# EAGLE board HM_Nightfall-mini-2e_v1 (EAGLE 9.6.2)
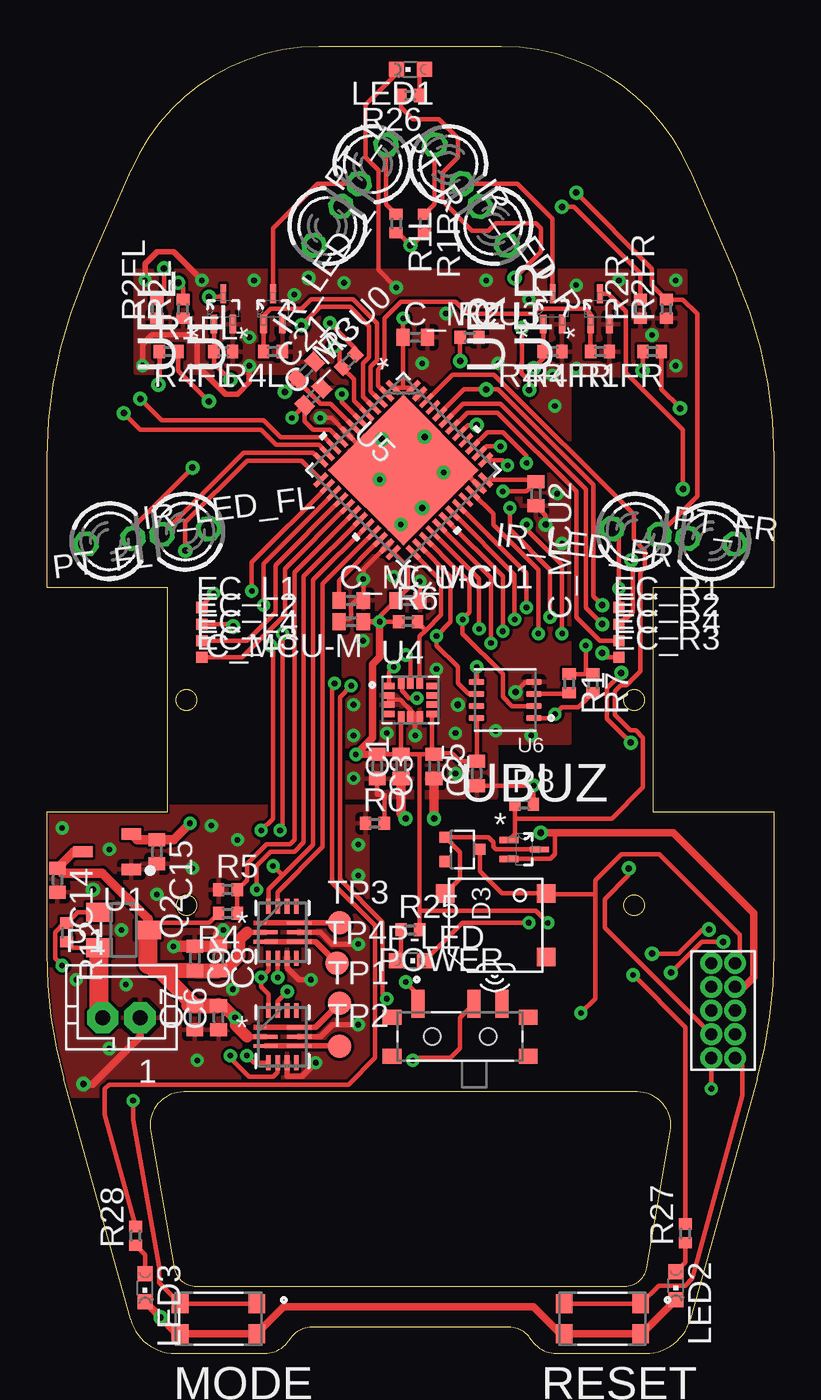
[diagram p0: board, top side]
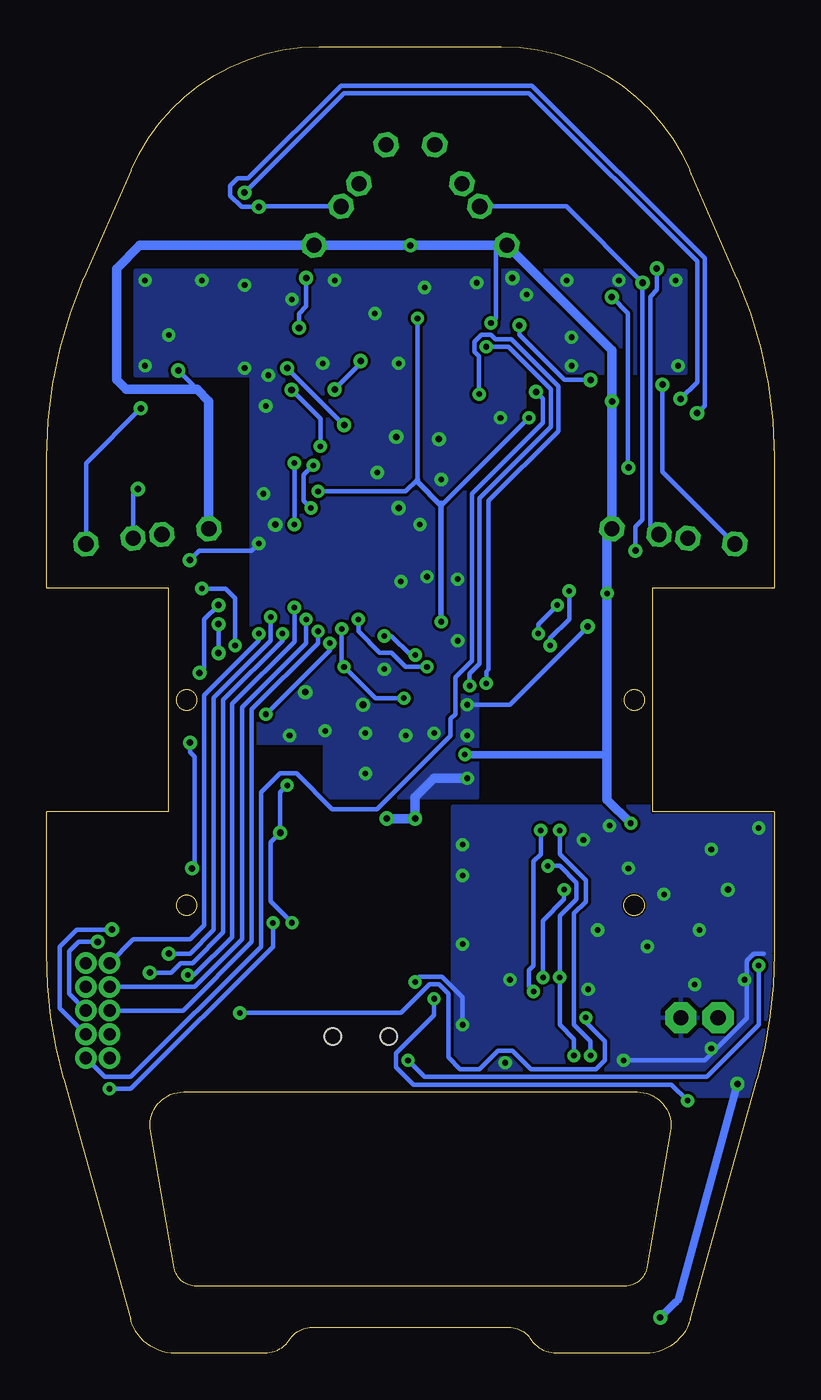
[diagram p1: board, bottom side, seen from below]

Size 39 x 70 mm. Coordinates in mm from the lower left corner, seen from the top.
Outline: 26.02,0.67 25.92,0.81 arc54 24.78,1.4 14.22,1.4 arc54 13.08,0.81 12.98,0.67 arc-54 11.68,0 6.9,0 arc-74 4.49,1.83 0.91,14.72 arc-16 0,21.41 0,29 6.5,29 6.5,41 0,41 0,48 arc-24 1.99,57.58 4.52,63.39 arc-66 14.61,70 24.39,70 arc-66 34.48,63.39 37.01,57.58 arc-24 39,48 39,41 32.5,41 32.5,29 39,29 39,21.41 arc-16 38.09,14.72 34.51,1.83 arc-74 32.1,0 27.32,0 arc-54 26.02,0.67
Outline: 31.66,14 7.34,14 arc100 5.56,11.89 6.83,4.6 arc80 8.01,3.6 30.99,3.6 arc80 32.17,4.6 33.44,11.89 arc100 31.66,14
Outline: circle at 7.5,24 radius 0.55
Outline: circle at 31.5,35 radius 0.55
Outline: circle at 31.5,24 radius 0.55
Outline: circle at 7.5,35 radius 0.55
Copper layers (1*16): Top 0.035mm / dielectric 1.5mm / Bottom 0.035mm
Design rules "default *": minimum track width 6mil, minimum drill 0.2mm, track to track 6mil, track to pad 6mil, pad to pad 6mil, via to via 6mil, smd to smd 6mil, copper to edge 0.1mm, drill to drill 0.15mm, minimum pad ring 10mil, minimum via ring 8mil, stop-mask expansion 4mil, vias tented up to drill 100mil, thermal gap 10mil
Net classes: 1 power: width 0.152 mm; 2 motor: width 0.152 mm

## Footprints (pad centres in the part's own frame; a part is rotated, then mirrored left to right if it is on the bottom)
C0402 = smd 0.7 x 0.9: 1 -0.65,0; 2 0.65,0
SOT323 = smd 0.6 x 0.6: 1 -0.65,-0.925; 2 0.65,-0.925; 3 0,0.925
TP06SQ = smd 0.6 x 0.6: TP 0,0
LED3MM = drill 0.813 octagon: A -1.27,0; K 1.27,0
62201021121 = drill 0.65: 1 -2.54,0.635; 2 -1.27,0.635; 3 0,0.635; 4 1.27,0.635; 5 2.54,0.635; 6 2.54,-0.635; 7 1.27,-0.635; 8 0,-0.635; 9 -1.27,-0.635; 10 -2.54,-0.635
CHIPLED_0603 = smd 0.8 x 0.8: A 0,-0.75; C 0,0.75
SW_TL6330AF200Q = smd 0.9 x 1: 1 -2.05,-0.8; 2 2.05,-0.8; 3 -2.05,0.8; 4 2.05,0.8
JST-PH2 = drill 0.813 pad 1.676 octagon: 1 1,0; 2 -1,0
SW_EG1215AA = smd 0.7 x 1.5: 1 -2.25,1.75; 2 0.75,1.75; 3 2.25,1.75 | smd 1 x 0.8: S1 -3.65,1.05; S2 -3.65,-1.05; S3 3.65,-1.05; S4 3.65,1.05 | hole 0.9: -1.5,0; 1.5,0
SOT23 = smd 1 x 1.4: 1 -0.95,-1.306; 2 0.95,-1.306; 3 0,1.306
R0402 = smd 0.6 x 0.7: 1 -0.5,0; 2 0.5,0
SMT-0540-S-R = smd 1 x 1: + 1.7,-2.7; - 1.7,2.7; M -1.7,-2.7
B1,27 = smd 1.27 x 1.27: TP 0,0
SOT95P280X145-3N = smd 1.05 x 0.6: 1 -1.3,0.95; 2 -1.3,-0.95; 3 1.3,0
QFN-14_MP6551_MNP = smd 0.127 x 0.127: 1 -0.95,0.5 | smd 1.3 x 0.2: 2 -0.9,0; 3 -0.9,-0.5; 8 0.9,-0.5; 9 0.9,0; 10 0.9,0.5 | smd 0.25 x 0.8: 4 -0.75,-1.4; 5 -0.25,-1.4; 6 0.25,-1.4; 7 0.75,-1.4; 11 0.75,1.4; 12 0.25,1.4; 13 -0.25,1.4; 14 -0.75,1.4
PQFN50P250X300X86-14N = smd 0.61 x 0.35: 1 -1.16,0.75; 2 -1.16,0.25; 3 -1.16,-0.25; 4 -1.16,-0.75; 8 1.16,-0.75; 9 1.16,-0.25; 10 1.16,0.25; 11 1.16,0.75 | smd 0.35 x 0.61: 5 -0.5,-0.91; 6 0,-0.91; 7 0.5,-0.91; 12 0.5,0.91; 13 0,0.91; 14 -0.5,0.91
UFQFPN-48_7X7X0P55MM-M = smd 0.908 x 0.255: 1 -3.502,2.75; 2 -3.502,2.25; 3 -3.502,1.75; 4 -3.502,1.25; 5 -3.502,0.75; 6 -3.502,0.25; 7 -3.502,-0.25; 8 -3.502,-0.75; 9 -3.502,-1.25; 10 -3.502,-1.75; 11 -3.502,-2.25; 12 -3.502,-2.75; 25 3.502,-2.75; 26 3.502,-2.25; 27 3.502,-1.75; 28 3.502,-1.25; 29 3.502,-0.75; 30 3.502,-0.25; 31 3.502,0.25; 32 3.502,0.75; 33 3.502,1.25; 34 3.502,1.75; 35 3.502,2.25; 36 3.502,2.75 | smd 0.255 x 0.908: 13 -2.75,-3.502; 14 -2.25,-3.502; 15 -1.75,-3.502; 16 -1.25,-3.502; 17 -0.75,-3.502; 18 -0.25,-3.502; 19 0.25,-3.502; 20 0.75,-3.502; 21 1.25,-3.502; 22 1.75,-3.502; 23 2.25,-3.502; 24 2.75,-3.502; 37 2.75,3.502; 38 2.25,3.502; 39 1.75,3.502; 40 1.25,3.502; 41 0.75,3.502; 42 0.25,3.502; 43 -0.25,3.502; 44 -0.75,3.502; 45 -1.25,3.502; 46 -1.75,3.502; 47 -2.25,3.502; 48 -2.75,3.502 | smd 5.69 x 5.69: 49 0,0
SON65P328X323X55-8N = smd 0.84 x 0.32: 1 -1.545,0.975; 2 -1.545,0.325; 3 -1.545,-0.325; 4 -1.545,-0.975; 5 1.545,-0.975; 6 1.545,-0.325; 7 1.545,0.325; 8 1.545,0.975
SOT50P160X90-3N = smd 1.016 x 0.356: 1 -0.813,0.508; 2 -0.813,-0.508 | smd 1.016 x 0.305: 3 0.813,0

## Placement (x,y rotation side)
C1  0.1u  [C0402]  18.99,31.44 90 top
C2  0.1u  [C0402]  20.77,31.44 270 top
C3  2.2u  [C0402]  17.72,31.44 270 top
C5  0.1u  [C0402]  23.06,31.06 90 top
C6  0.1u  [C0402]  9.21,17.98 90 top
C7  10u  [C0402]  7.94,17.98 90 top
C8  0.1u  [C0402]  9.21,21.16 270 top
C9  10u  [C0402]  7.94,21.16 270 top
C14  1u  [C0402]  0.58,25.35 270 top
C15  2.2u  [C0402]  5.91,26.87 270 top
C21  0.1u  [C0402]  13.91,52.65 45 top
C_MCU0  0.1u  [C0402]  14.29,51.26 45 top
C_MCU1  0.1u  [C0402]  19.37,40.33 0 top
C_MCU2  0.1u  [C0402]  26.23,46.05 270 top
C_MCU3  0.1u  [C0402]  19.75,54.43 0 top
C_MCU-C  2.2u  [C0402]  16.32,40.33 0 top
C_MCU-M  4.7u  [C0402]  16.32,39.19 180 top
D3  BAS16WT1GW  [SOT323]  22.29,27 270 top
EC_L1  PTR1TP06SQ  [TP06SQ]  8.32,39.95 0 top
EC_L2  PTR1TP06SQ  [TP06SQ]  8.32,39.06 0 top
EC_L3  PTR1TP06SQ  [TP06SQ]  8.32,37.29 0 top
EC_L4  PTR1TP06SQ  [TP06SQ]  8.32,38.18 0 top
EC_R1  PTR1TP06SQ  [TP06SQ]  30.68,39.95 0 top
EC_R2  PTR1TP06SQ  [TP06SQ]  30.68,39.06 0 top
EC_R3  PTR1TP06SQ  [TP06SQ]  30.68,37.29 0 top
EC_R4  PTR1TP06SQ  [TP06SQ]  30.68,38.18 0 top
IR_LED_FL  [LED3MM]  3.37,43.51 7 top
IR_LED_FR  [LED3MM]  35.63,43.51 173 top
IR_LED_L  [LED3MM]  17.47,63.7 235 top
IR_LED_R  [LED3MM]  21.53,63.7 305 top
K1  62201021121  [62201021121]  36.26,18.36 270 top
LED1  [CHIPLED_0603]  19.5,68.78 90 top
LED2  [CHIPLED_0603]  33.72,3.63 180 top
LED3  [CHIPLED_0603]  5.28,3.5 180 top
MODE  TL6330AF200Q  [SW_TL6330AF200Q]  9.21,1.85 180 top
P1  [JST-PH2]  4.01,17.98 0 top
P-LED  [CHIPLED_0603]  19.5,21.03 270 top
POWER  EG1215AA  [SW_EG1215AA]  22.17,16.97 0 top
PT_FL  [LED3MM]  7.44,44.02 187 top
PT_FR  [LED3MM]  31.56,44.02 353 top
PT_L  [LED3MM]  15.05,60.4 55 top
PT_R  [LED3MM]  23.95,60.4 125 top
Q2  IRLML6402TRPBF  [SOT23]  4.13,22.68 270 top
R0  0  [R0402]  17.59,28.4 0 top
R1  10k  [R0402]  28.01,35.89 270 top
R1FL  10  [R0402]  6.55,53.67 0 top
R1FR  10  [R0402]  32.45,53.67 180 top
R1L  10  [R0402]  18.74,60.53 270 top
R1R  10  [R0402]  20.26,60.53 270 top
R2  10k  [R0402]  22.68,54.43 0 top
R2FL  1k  [R0402]  5.91,55.96 90 top
R2FR  1k  [R0402]  33.22,55.96 90 top
R2L  1k  [R0402]  7.31,55.96 90 top
R2R  1k  [R0402]  31.82,55.96 90 top
R3  10k  [R0402]  16.2,53.16 45 top
R4  22k  [R0402]  9.72,23.57 180 top
R4FL  10k  [R0402]  9.47,53.67 180 top
R4FR  10k  [R0402]  29.66,53.67 180 top
R4L  10k  [R0402]  12.13,53.67 180 top
R4R  10k  [R0402]  27.12,53.67 180 top
R5  10k  [R0402]  9.72,24.84 0 top
R6  10k  [R0402]  19.37,39.19 0 top
R7  10k  [R0402]  29.28,35.89 270 top
R8  10k  [R0402]  25.6,29.41 0 top
R12  10k  [R0402]  1.09,22.55 270 top
R25  1k  [R0402]  19.5,22.68 0 top
R26  1k  [R0402]  19.5,67.39 180 top
R27  1k  [R0402]  34.23,6.43 90 top
R28  1k  [R0402]  4.77,6.3 90 top
RESET  TL6330AF200Q  [SW_TL6330AF200Q]  29.79,1.85 180 top
SPK1  SMT-0540-S-R  [SMT-0540-S-R]  24.07,22.94 90 top
TP1  TPB1,27  [B1,27]  15.69,18.74 0 top
TP2  TPB1,27  [B1,27]  15.69,16.46 0 top
TP3  TPB1,27  [B1,27]  15.69,23.06 0 top
TP4  TPB1,27  [B1,27]  15.56,20.9 0 top
U1  AP2210N-3.3TRG1  [SOT95P280X145-3N]  3.24,26.87 180 top
U2  MP6551GQB-P  [QFN-14_MP6551_MNP]  12.64,22.55 0 top
U3  MP6551GQB-P  [QFN-14_MP6551_MNP]  12.64,16.97 0 top
U4  ISM330DHCXTR  [PQFN50P250X300X86-14N]  19.5,35 0 top
U5  STM32F413CHU6TRUFQFPN-48_7X7X0P55MM-M  [UFQFPN-48_7X7X0P55MM-M]  19.12,47.32 315 top
U6  CY15B108QI-20LPXC  [SON65P328X323X55-8N]  24.58,35 180 top
UBUZ  2N7002TQ-7-F  [SOT50P160X90-3N]  25.6,27 0 top
UFL  2N7002TQ-7-F  [SOT50P160X90-3N]  9.47,55.96 90 top
UFR  2N7002TQ-7-F  [SOT50P160X90-3N]  29.66,55.96 90 top
UL  2N7002TQ-7-F  [SOT50P160X90-3N]  12.13,55.96 90 top
UR  2N7002TQ-7-F  [SOT50P160X90-3N]  27.12,55.96 90 top

## Library data of the parts
C1-C3 C5-C9 C14 C15 C21 C_MCU0 C_MCU1-C_MCU3 C_MCU-C C_MCU-M = rcl; SPICEPREFIX: C
D3 = BAS16WT1G; AVAILABILITY: In Stock; CHECK_PRICES: https://www.snapeda.com/parts/BAS16WT1G/Onsemi/view-part/?ref=eda; DESCRIPTION: DIODE, SIGNAL, 75V, SC70; Diode Type:Small Signal; Voltage, Vrrm:75V; Time, trr Typ:6ns; Voltage, Vf Max:1.25V; Temperature, Tj Max:150°C; Termination Type:SMD; Operating Temperature Range:-55°C to +150°C; Case Style:SC-70; No. of Pins:3; Voltage, Breakdown Max:75V; MF: ON Semiconductor; MP: BAS16WT1G; PACKAGE: SC-70-3 ON Semiconductor; PRICE: None; SNAPEDA_LINK: https://www.snapeda.com/parts/BAS16WT1G/Onsemi/view-part/?ref=snap
EC_L1-EC_L4 EC_R1-EC_R4 TP1-TP4 = testpad
IR_LED_FL IR_LED_FR IR_LED_L IR_LED_R LED1-LED3 P-LED PT_FL PT_FR PT_L PT_R = led
K1 = pinheader_1m27
MODE RESET = TL6330AF200Q; AVAILABILITY: In Stock; CHECK_PRICES: https://www.snapeda.com/parts/TL6330AF200Q/E-Switch/view-part/?ref=eda; DESCRIPTION: Tactile Switch SPST-NO Top Actuated Surface Mount; MF: E-Switch; MP: TL6330AF200Q; PACKAGE: None; PRICE: None; PURCHASE-URL: https://www.snapeda.com/api/url_track_click_mouser/?unipart_id=2720563&manufacturer=E-Switch&part_name=TL6330AF200Q&search_term=tl6330af200q; SNAPEDA_LINK: https://www.snapeda.com/parts/TL6330AF200Q/E-Switch/view-part/?ref=snap
P1 = jst-ph
POWER = EG1215AA; AVAILABILITY: In Stock; CHECK_PRICES: https://www.snapeda.com/parts/EG1215AA/E-Switch/view-part/?ref=eda; DESCRIPTION: Slide Switch SPDT Surface Mount, Right Angle; MF: E-Switch; MP: EG1215AA; PACKAGE: None; PRICE: None; PURCHASE-URL: https://www.snapeda.com/api/url_track_click_mouser/?unipart_id=3210616&manufacturer=E-Switch&part_name=EG1215AA&search_term=eg1215aa; SNAPEDA_LINK: https://www.snapeda.com/parts/EG1215AA/E-Switch/view-part/?ref=snap
Q2 = IRLML6402; AVAILABILITY: In Stock; CHECK_PRICES: https://www.snapeda.com/parts/IRLML6402/Infineon/view-part/?ref=eda; DESCRIPTION: P-Channel 20 V 3.7A (Ta) 1.3W (Ta) Surface Mount Micro3â„¢ /SOT-23; MF: Infineon Technologies; MP: IRLML6402; PACKAGE: SOT-23-3 ON Semiconductor; PRICE: None; SNAPEDA_LINK: https://www.snapeda.com/parts/IRLML6402/Infineon/view-part/?ref=snap
R0 R1 R1FL R1FR R1L R1R R2 R2FL R2FR R2L R2R R3 R4 R4FL R4FR R4L R4R R5-R8 R12 R25-R28 = rcl; SPICEPREFIX: R
SPK1 = SMT-0540-S-R; DESCRIPTION: Buzzers Transducer, Externally Driven Electromechanical/Magnetic 3V 100mA 4kHz 78dB @ 3V, 10cm Surface Mount Solder Pads; DIGI-KEY_PART_NUMBER: 668-1060-1-ND; MF: PUI; MP: SMT-0540-S-R; PACKAGE: PUI; PURCHASE-URL: https://pricing.snapeda.com/search/part/SMT-0540-S-R/?ref=eda
U1 = AP2210N-3.3TRG1; AVAILABILITY: In Stock; CHECK_PRICES: https://www.snapeda.com/parts/AP2210N-3.3TRG1/Diodes+Inc./view-part/?ref=eda; DESCRIPTION: Voltage Regulators, LDO, 300mA CMOS LDO 3.3V 250mV | Diodes Inc AP2210N-3.3TRG1; MF: Diodes Inc.; MP: AP2210N-3.3TRG1; PACKAGE: SOT-23-3 Diodes Inc.; PRICE: None; PURCHASE-URL: https://www.snapeda.com/api/url_track_click_mouser/?unipart_id=492437&manufacturer=Diodes Inc.&part_name=AP2210N-3.3TRG1&search_term=ldo 3.3v; SNAPEDA_LINK: https://www.snapeda.com/parts/AP2210N-3.3TRG1/Diodes+Inc./view-part/?ref=snap
U2 U3 = MP6551; COPYRIGHT: Copyright (C) 2025 Ultra Librarian. All rights reserved.; MANUFACTURER_PART_NUMBER: MP6551GQB-P; MFR_NAME: Monolithic Power Systems
U4 = ISM330DHCXTR; AVAILABILITY: In Stock; CHECK_PRICES: https://www.snapeda.com/parts/ISM330DHCXTR/STMicroelectronics/view-part/?ref=eda; DESCRIPTION: Accelerometer, Gyroscope, Temperature, 6 Axis Sensor I2C, SPI Output; MF: STMicroelectronics; MP: ISM330DHCXTR; PACKAGE: VFLGA-14 STMicroelectronics; PRICE: None; SNAPEDA_LINK: https://www.snapeda.com/parts/ISM330DHCXTR/STMicroelectronics/view-part/?ref=snap
U5 = STM32F413CHU6TR; COPYRIGHT: Copyright (C) 2026 Ultra Librarian. All rights reserved.; DATASHEET: https://www.st.com/resource/en/datasheet/stm32f413cg.pdf; DESCRIPTION: High-performance access line, Arm Cortex-M4 core with DSP and FPU, 1,5 MByte of Flash memory, 100 MHz CPU, ART Accelerator, DFSDM; MANUFACTURER_NAME: STMicroelectronics; MANUFACTURER_PART_NUMBER: STM32F413CHU6TR
U6 = CY15B108QI-20LPXC; AVAILABILITY: In Stock; CHECK_PRICES: https://www.snapeda.com/parts/CY15B108QI-20LPXC/Infineon/view-part/?ref=eda; DESCRIPTION: FRAM (Ferroelectric RAM) Memory IC 8Mb (1M x 8) SPI 20 MHz 8-GQFN (3.23x3.28); MF: Cypress Semiconductor; MP: CY15B108QI-20LPXC; PACKAGE: UQFN-8 Cypress Semiconductor Corp; PRICE: None; PURCHASE-URL: https://www.snapeda.com/api/url_track_click_mouser/?unipart_id=4328169&manufacturer=Cypress Semiconductor&part_name=CY15B108QI-20LPXC&search_term=None; SNAPEDA_LINK: https://www.snapeda.com/parts/CY15B108QI-20LPXC/Infineon/view-part/?ref=snap
UBUZ UFL UFR UL UR = 2N7002TQ-7-F; AVAILABILITY: In Stock; CHECK_PRICES: https://www.snapeda.com/parts/2N7002TQ-7-F/Diodes+Inc./view-part/?ref=eda; DESCRIPTION: N-Channel 60 V 115mA (Ta) 150mW (Ta) Surface Mount SOT-523; MF: Diodes Inc.; MP: 2N7002TQ-7-F; PACKAGE: SOT-523 Diodes Inc.; PRICE: None; SNAPEDA_LINK: https://www.snapeda.com/parts/2N7002TQ-7-F/Diodes+Inc./view-part/?ref=snap

## Nets
+3V3 [power]: C1.2 C2.1 C3.1 C5.2 C15.1 C_MCU0.1 C_MCU1.1 C_MCU2.1 C_MCU3.1 C_MCU-M.1 EC_L1.TP EC_R1.TP K1.6 PT_FL.A PT_FR.A PT_L.A PT_R.A R1.1 R1FL.2 R1FR.2 R1L.2 R1R.2 R3.2 R6.1 R7.1 R25.2 U1.2 U4.5 U4.8 U5.1 U5.9 U5.24 U5.36 U5.48 U6.8
+5V [power]: C6.2 C7.2 C8.2 C9.2 C14.1 D3.3 K1.1 Q2.3 R4.2 SPK1.+ U1.3 U2.2 U3.2
BOOT0: K1.7 R2.1 U5.44
BUZZER_PWM: R8.1 U5.46 UBUZ.1
EC_L_A: EC_L4.TP U5.16
EC_L_B: EC_L3.TP U5.17
EC_R_A: EC_R4.TP U5.42
EC_R_B: EC_R3.TP U5.43
FAN_PWM: U5.45
FRAM_CS: R7.2 U5.29 U6.1
GND [motor]: C1.1 C2.2 C3.2 C5.1 C21.2 C_MCU0.2 C_MCU1.2 C_MCU2.2 C_MCU3.2 C_MCU-C.2 C_MCU-M.2 EC_L2.TP EC_R2.TP K1.2 LED1.C P-LED.C R0.2 R2.2 R2FL.1 R2FR.1 R2L.1 R2R.1 R4FL.1 R4FR.1 R4L.1 R4R.1 R8.2 U4.2 U4.3 U4.6 U4.7 U5.8 U5.23 U5.35 U5.47 U5.49 U6.4 UBUZ.2 UFL.2 UFR.2 UL.2 UR.2
GND2 [motor]: C6.1 C7.1 C8.1 C9.1 C14.2 C15.2 LED2.C LED3.C MODE.3 MODE.4 P1.1 POWER.1 R0.1 R5.1 RESET.3 RESET.4 U1.1 U2.6 U2.9 U3.6 U3.9
IMU_CS: R6.2 U4.12 U5.25
IR_FL: R4FL.2 U5.4 UFL.1
IR_FR: R4FR.2 U5.2 UFR.1
IR_L: R4L.2 U5.3 UL.1
IR_R: R4R.2 U5.41 UR.1
LED_1: R26.2 U5.38
LED_2: R27.2 U5.32
LED_3: R28.2 U5.6
MOTOR_L_DIR: U3.5 U5.14
MOTOR_L_OUT1 [motor]: TP1.TP U3.1 U3.10
MOTOR_L_OUT2 [motor]: TP2.TP U3.3 U3.8
MOTOR_L_PWM: U3.13 U5.15
MOTOR_R_DIR: U2.5 U5.19
MOTOR_R_OUT1 [motor]: TP3.TP U2.1 U2.10
MOTOR_R_OUT2 [motor]: TP4.TP U2.3 U2.8
MOTOR_R_PWM: U2.13 U5.21
MOTOR_STBY: U2.4 U2.14 U3.4 U3.14 U5.20
N$2: IR_LED_FL.K UFL.3
N$4: R1.2 U6.3
N$5: C_MCU-C.1 U5.22
N$7: P1.2 Q2.2 R12.2
N$8: IR_LED_FL.A R1FL.1
N$10: IR_LED_L.K UL.3
N$11: POWER.2 Q2.1 R12.1
N$16: IR_LED_L.A R1L.1
N$18: IR_LED_FR.K UFR.3
N$21: P-LED.A R25.1
N$23: D3.1 SPK1.- UBUZ.3
N$27: LED1.A R26.1
N$28: IR_LED_FR.A R1FR.1
N$29: IR_LED_R.K UR.3
N$30: IR_LED_R.A R1R.1
N$36: LED2.A R27.1
N$41: LED3.A R28.1
NRST: C21.1 K1.5 RESET.1 RESET.2 U5.7
PUSH_IN_1: MODE.1 MODE.2 R3.1 U5.5
SENSOR_FL: PT_FL.K R2FL.2 U5.12
SENSOR_FR: PT_FR.K R2FR.2 U5.10
SENSOR_L: PT_L.K R2L.2 U5.13
SENSOR_R: PT_R.K R2R.2 U5.11
SPI2_MISO: U4.1 U5.27 U6.2
SPI2_MOSI: U4.14 U5.28 U6.5
SPI2_SCK: U4.13 U5.26 U6.6
SWCLK: K1.4 U5.37
SWDIO: K1.3 U5.34
SWO: K1.10 U5.39
USART1_RX: K1.9 U5.31
USART1_TX: K1.8 U5.30
VOL_CHECK: R4.1 R5.2 U5.18

## Tracks (layer width: path | path; a pad name or v marks a point on that pad's centre or on a via)
+3V3  (via drill 0.3, 0.35)
  Top 0.254: 13.87,50.8 C_MCU0.1 | U5.1 19.12,51.74 | 19.12,51.74 19.1,51.76 C_MCU3.1 19.1,55.43 v19.12,55.45 | U5.36 26.14,46.79 C_MCU2.1 25.71,46.18 v24.45,46.18 | C_MCU0.1 v13.15,50.11 | v13.15,50.11 | 17.47,39.19 17.58,39.19 C_MCU1.1 19.37,40.98 19.37,42.11 U5.24 | U6.8 23.06,34 C5.2 22.15,31.71 21.71,32.15 20.71,32.15 | U4.8 20.66,32.2 20.71,32.15 | 20.71,32.15 C2.1 20.01,32.09 | U4.5 19,32.21 | 19,32.21 19,32.1 C1.2 C3.1 | 20.01,32.09 19.11,32.09 19,32.21 | R6.1 v17.85,39.19 | EC_L1.TP 8.32,40.08 v8.96,40.72 | EC_R1.TP v30.68,40.97 30.68,43.8 PT_FR.A | R1.1 28.9,36.39 | R7.1 28.9,36.39 | 28.9,36.39 v28.9,37.92 | R25.2 20,23.7 | 20,23.7 20,32.09 20.01,32.09 | K1.6 v35.63,14.17 | v26.87,23.06 26.23,23.7 20,23.7 | U5.9 15.19,49.48 14.29,49.48 13.83,49.94 C_MCU0.1 | R3.2 16.55,53.82 v15.18,55.19 | R1R.2 19.59,59.36 v19.5,59.36 18.83,60.03 R1L.2 | R1FR.2 31.95,52.66 v31.95,52.65 | R1FL.2 7.05,52.65 v8.7,51 | 19.12,51.74 U5.48
  Top 0.305: C_MCU-M.1 17.47,39.19 v17.85,39.19
  Top 0.406: C3.1 16.59,32.09 | 16.59,32.09 v16.58,32.08 | 16.59,32.09 17.47,32.97 17.47,36.91 17.85,37.29 v17.85,39.19
  Top 0.508: U1.2 4.84,27.52 C15.1 6.81,27.52 v7.69,28.4
  Bottom 0.254: v13.15,50.11 17.85,45.41 | v19.12,55.45 19.12,46.81 19.75,46.18 v24.45,46.18 | v28.9,37.92 28.9,40.46 29.41,40.97 v30.68,40.97 | v35.63,14.17 34.48,14.17 26.87,21.79 v26.87,23.06 | v15.18,55.19 14.93,55.45 14.93,59.36 | v31.95,52.65 30.3,51.01 30.3,51
  Bottom 0.305: v17.85,39.19 17.85,45.41 | 17.85,45.54 17.85,45.41 | 17.85,45.41 19.12,46.68 19.12,46.81
  Bottom 0.406: v16.58,32.08 8.96,32.08
  Bottom 0.508: v7.69,28.4 8.96,29.67 8.96,32.08 v8.96,40.72 8.96,43.91 PT_FL.A v8.7,51 8.7,53.73 PT_L.A 14.93,59.36 v19.5,59.36 PT_R.A 34,59.36 35.25,58.11 35.25,52.15 34.74,51.64 30.93,51.64 30.3,51.01 | 30.3,51 PT_FR.A
+5V  (via drill 0.3)
  Top 0.254: Q2.3 5.82,23.06 8.71,23.06 R4.2 | v28.64,18.24 29.41,19 29.41,24.59 | K1.1 37.15,21.16 37.15,22.43 32.84,26.75 30.8,26.75 29.41,25.35 29.41,24.59 | 29.41,24.59 26.82,24.59 SPK1.+ 24.4,24.64 23.22,25.82 D3.3
  Top 0.305: U2.2 10.74,22.55 | U3.2 10.74,16.97
  Top 0.508: U1.3 1.45,26.87 C14.1 0.85,25.73 2.99,25.73 5.44,23.28 Q2.3
  Top 0.61: 10.74,22.55 10.36,22.17 10.36,21.28 9.58,20.51 C8.2 | C6.2 9.45,18.63 v10.1,17.98 10.1,17.89 10.12,17.87 10.12,17.58 10.74,16.97
  Top 0.813: C8.2 C9.2 6.07,20.51 | 7.64,18.63 C7.2 | C7.2 C6.2 | 5.44,20.83 5.76,20.51 6.07,20.51 | C7.2 6.07,20.51
  Top 1.016: 5.44,20.83 Q2.3
  Bottom 0.254: v28.64,18.24 20.01,18.24 18.48,19.76 17.98,19.76 17.47,19.25 17.47,15.85 16.83,15.21 15.79,15.21 14.8,16.2 14.04,16.2 13.05,15.21 9.57,15.21 9.09,15.7 9.09,16.71 10.1,17.73 v10.1,17.98
BOOT0  (via drill 0.35)
  Top 0.254: v29.79,40.08 29.3,40.56 29.3,46.53 24.2,51.64 v23.56,51.64 22.38,51.64 U5.44 | v30.8,36.46 30.8,36.4 30.04,35.64 30.04,33.98 v31.31,32.71 | v31.21,25.98 31.18,25.96 31.18,25.6 29.91,24.33 29.91,22.81 K1.7 | v22.17,53.16 R2.1
  Bottom 0.254: v29.79,40.08 30.55,39.32 30.55,36.71 v30.8,36.46 | v31.31,32.71 31.31,32.21 31.06,31.95 31.06,26.13 v31.21,25.98 | v23.56,51.64 22.17,53.03 v22.17,53.16
BUZZER_PWM
  Top 0.254: R8.1 25.1,28.65 | 25.1,28.65 25.1,27.82 UBUZ.1 | U5.46 21.75,52.42 23.99,52.42 31.47,44.94 31.47,43.6 32.07,43 32.07,42.11 31.82,41.86 31.82,36.54 31.07,35.8 30.78,35.8 30.45,35.47 30.45,34.21 31.29,33.37 31.58,33.37 31.97,32.99 31.97,30.32 30.3,28.65 25.1,28.65
EC_L_A
  Top 0.254: U5.16 12.26,42.23 12.26,39.7 10.74,38.18 EC_L4.TP
EC_L_B
  Top 0.254: U5.17 12.77,42.03 12.77,39.57 10.48,37.29 EC_L3.TP
EC_R_A
  Top 0.254: U5.42 22.55,50.39 24.18,50.39 28.39,46.18 28.39,39.45 29.66,38.18 EC_R4.TP
EC_R_B  (via drill 0.35)
  Top 0.254: U5.43 22.32,50.88 24.33,50.88 28.9,46.3 28.9,39.95 v29.79,39.06 | v29.79,37.52 30.02,37.29 EC_R3.TP
  Bottom 0.254: v29.79,39.06 v29.79,37.52
FRAM_CS  (via drill 0.3)
  Top 0.254: U6.1 27.03,34.03 v27.25,34.24 27.63,34.62 28.51,34.62 R7.2 | 23.82,41.56 v23.82,38.05 | U5.29 23.82,41.56 | 23.82,41.56
  Bottom 0.254: v27.25,34.24 23.82,37.67 v23.82,38.05
GND  (via drill 0.3, 0.35)
  Top 0.254: U4.2 18.34,35 | 18.34,35 U4.3 | U4.6 19.75,34.09 | U4.7 19.75,34.09 | 18.34,35 18.96,35 19.29,34.67 19.75,34.21 19.75,34.09 | 19.75,34.09 v19.75,33.1 | C_MCU1.2 20.02,41.34 v20.01,41.35 | C_MCU-M.2 15.8,39.32 16.2,39.32 16.32,39.45 16.32,40.08 16.58,40.33 C_MCU-C.2 v16.98,41.48 16.98,41.99 U5.23 | C_MCU2.2 26.74,44.89 v26.74,44.4 | P-LED.C 22.28,23.06 v25.85,23.06 | UBUZ.2 26.99,26.49 27.25,26.75 27.25,27.89 | v17.85,46.81 17.85,47.53 U5.8 15.26,50.11 v14.67,50.11 | R8.2 v26.1,30.42 | v26.1,30.42 v26.1,30.43 | U6.4 25.68,35.98 v25.13,35.42 | LED1.C 18.75,68.54 17.09,66.88 17.09,64.08 17.79,63.38 17.79,58.05 v18.74,57.1 | U5.35 22.43,47.19 v21.28,47.19 | v10,38.94 9.87,39.06 EC_L2.TP | EC_R2.TP 30.99,39.37 31.09,39.37 31.41,39.7 31.41,42.41 v31.33,42.49 | C3.2 17.72,29.92 18.1,29.92 18.1,28.4 R0.2 | C5.1 26.09,30.41 v26.1,30.42
  Top 0.305: v10.86,52.91 10.86,52.02 10.23,51.38 9.59,51.38 8.07,52.91 8.07,54.18 7.69,54.56 5.66,54.56 5.15,54.05 v5.15,52.91 | v5.28,57.48 5.28,58.37 5.91,59 6.8,59 v8.32,57.48
  Top 0.406: K1.2 37.41,19.63 37.91,20.14 37.91,23.57 33.6,27.89 27.25,27.89 v26.48,27.89
  Top 0.508: C2.2 v20.77,28.65 | v19.25,28.65 18.99,28.9 C1.1
  Bottom 0.254: v25.85,23.06 26.99,24.21 26.99,27.38 v26.48,27.89 26.48,30.05 v26.1,30.43 | v16.45,34.75 14.17,34.75 10,38.91 v10,38.94 | v31.33,42.49 30.83,43 28.01,43 v27.63,43.38
  Bottom 0.508: v20.77,28.65 v19.25,28.65 19.25,29.79 18.23,30.81 v16.45,30.81
  other vias: 18.99,44.4 10.86,54.43 13.28,56.72 15.94,57.35 21.41,55.7 20.14,53.03 23.56,57.48 25.85,56.46 24.2,53.03 27.12,52.4 27.25,50.75 28.39,52.78 27.37,46.05 33.72,52.91 32.45,54.56 30.68,57.48 28.39,57.23 33.72,57.48 11.12,57.48 24.07,33.35 21.91,31.06 18.23,33.22 16.45,33.1 18.61,41.6 16.96,38.18 20.9,36.65 21.91,33.22 14.04,57.61 17.98,48.97 20.26,49.1 20.14,45.29 22.04,34.75 25.98,33.1
  pour Top: 4.77,52.53 13.4,52.53 13.4,46.05 15.94,43.51 15.94,29.79 24.07,29.79 24.07,32.71 28.01,32.71 28.01,52.4 34.23,52.4 34.23,57.99 4.77,57.99
  pour Bottom: 4.77,57.99 34.23,57.99 34.23,52.4 28.01,52.4 28.01,32.71 24.07,32.71 24.07,29.79 15.94,29.79 15.94,43.51 13.4,46.05 13.4,52.53 4.77,52.53
GND2  (via drill 0.3, 0.35)
  Top 0.254: POWER.1 19.92,19.22 v19.25,19.89
  Top 0.305: v16.71,21.92 15.31,21.92 14.67,22.55 U2.9 | U3.9 14.69,16.97 15.32,17.6 v16.71,17.6 | U3.6 12.89,14.84 12.9,14.83 13.68,14.83 v14.42,15.57 | U2.6 12.89,20.65 13.53,20.01 v14.17,20.01
  Top 0.406: LED2.C 31.9,1.05 RESET.3 RESET.4 27.54,1.05 26.1,2.49 12.7,2.49 MODE.3 MODE.4 6.98,1.05 v6.11,1.92 LED3.C | v1.97,14.43 2.48,14.43 5.01,16.95 P1.1
  Top 0.61: v6.8,21.79 6.81,21.81 C9.1 C8.1 9.21,22.43 v9.47,22.68
  Bottom 0.254: v19.25,19.89 19.25,19.95 19.03,20.17 17.81,20.17 16.71,19.07 v16.71,17.6 | 0.57,21.41 1.09,21.41 1.46,21.04 1.46,17.94 3.71,15.7 v8.07,15.7
  Bottom 0.406: v6.11,1.92 LED3.C | LED3.C 5.15,2.88 v1.97,14.43 | LED3.C
  other vias: 0.83,28.14 3.37,27 8.83,28.27 7.82,25.98 5.91,24.59 4.01,22.68 4.26,19.76 1.59,20.01 3.37,16.33 9.97,19.51 10.23,27.51 16.71,25.6 16.71,27.25 2.48,24.84
  pour Top: -0.18,29.29 17.21,29.29 17.21,13.79 0.58,13.79 -0.18,14.55
  pour Bottom: -0.18,29.29 17.21,29.29 17.21,13.79 0.58,13.79 -0.18,14.55
IMU_CS
  Top 0.254: U4.12 20,38.42 20.33,38.75 | 21.15,41.4 21.15,39.57 20.33,38.75 | R6.2 20.32,38.75 20.33,38.75 | U5.25 21.15,41.4 | 21.15,41.4
IR_FL  (via drill 0.35)
  Top 0.254: UFL.1 R4FL.2 8.97,53.03 v9.85,52.15 | U5.4 16.96,51.25 16.96,53.03 17.29,53.36 17.29,55.03 16.26,56.06 14.65,56.06 v13.66,55.07
  Bottom 0.254: v13.66,55.07 13.66,54.56 11.24,52.15 v9.85,52.15
IR_FR
  Top 0.254: U5.2 17.77,51.85 17.77,52.7 18.1,53.03 18.1,55.45 18.99,56.34 21.91,56.34 22.55,55.7 26.1,55.7 26.16,55.75 26.16,55.77 26.34,55.96 28.9,55.96 29.15,55.7 UFR.1 R4FR.2
IR_L
  Top 0.254: R4L.2 UL.1 11.63,55.57 12.01,55.96 13.66,55.96 14.17,56.46 16.43,56.46 17.7,55.19 17.7,53.2 17.37,52.87 17.37,51.55 U5.3
IR_R  (via drill 0.35)
  Top 0.152: R4R.2
  Top 0.254: U5.41 22.59,49.73 v23.06,49.73 | v26.1,52.78 26.62,53.3 R4R.2 UR.1
  Bottom 0.254: v23.06,49.73 v26.1,52.78
LED_1  (via drill 0.3, 0.35)
  Top 0.254: U5.38 23.57,48.59 v24.33,48.59 | v25.87,51.62 25.87,52.08 25.45,52.51 25.45,53.05 25.47,53.08 v25.47,54.94 | R26.2 19,66.74 19.63,66.12 21.02,66.12 22.04,65.1 22.04,64.08 21.21,63.25 21.21,61.74 22.8,60.15 23.69,60.15 24.07,60.53 26.23,60.53 26.48,60.27 26.48,59 v25.09,57.61
  Bottom 0.254: v24.33,48.59 24.33,50.07 v25.87,51.62 | v25.47,54.94 25.47,55.7 25.09,56.08 v25.09,57.61
LED_2  (via drill 0.3)
  Top 0.254: U5.32 25.72,41.78 v25.72,39.95 | v31.44,20.27 34.23,17.47 R27.2
  Bottom 0.254: v25.72,39.95 25.72,38.12 29.05,34.79 29.05,22.3 31.08,20.27 v31.44,20.27
LED_3  (via drill 0.3)
  Top 0.254: R28.2 3.12,12.78 3.12,14.17 3.35,14.4 16.17,14.4 17.59,15.82 17.59,22.94 15.31,25.22 15.31,35.76 v15.43,35.89 | U5.6 15.82,50.98 v15.82,51.38
  Bottom 0.254: v15.43,35.89 15.43,36.53 15.31,36.65 15.31,45.67 11.57,49.4 11.57,51.82 14.08,54.33 14.95,54.33 15.17,54.56 15.7,54.56 16.07,54.19 16.07,53.66 15.82,53.41 v15.82,51.38
MOTOR_L_DIR  (via drill 0.3)
  Top 0.254: U3.5 12.39,15.07 12.13,14.81 10.86,14.81 9.85,15.82 v9.85,15.95 | U5.14 10.99,42.37 v10.99,40.84 | v12.01,37.92 12.13,37.79 12.13,28.65 v11.5,28.02
  Bottom 0.254: v10.99,40.84 10.99,39.32 12.01,38.3 v12.01,37.92 | v11.5,28.02 11.5,26.75 10.1,25.35 10.1,24.21 10.74,23.57 10.74,17.6 9.85,16.71 v9.85,15.95
MOTOR_L_OUT1
  Top 0.305: U3.1 U3.10 14.41,17.47 TP1.TP
MOTOR_L_OUT2
  Top 0.305: U3.3 U3.8 TP2.TP
MOTOR_L_PWM  (via drill 0.3)
  Top 0.254: U3.13 12.39,18.88 v12.9,19.38 | U5.15 11.63,42.3 v11.63,40.08 | v12.64,38.55 12.64,28.14 v12.52,28.02
  Bottom 0.254: v11.63,40.08 12.64,39.06 v12.64,38.55 | v12.52,28.02 12.52,26.75 12.9,26.36 12.9,20.78 13.15,20.52 13.15,19.63 v12.9,19.38
MOTOR_R_DIR  (via drill 0.3)
  Top 0.254: U2.5 v12.39,20.14 | U5.19 13.79,41.63 13.79,27.38 13.28,26.87 12,26.87 11.5,26.37 11.26,26.12 v11.26,24.84
  Bottom 0.254: v11.26,24.84 11.26,24.32 12.39,23.19 v12.39,20.14
MOTOR_R_OUT1
  Top 0.305: U2.1 U2.10 TP3.TP
MOTOR_R_OUT2
  Top 0.305: TP4.TP 14.41,22.05 U2.8 U2.3
MOTOR_R_PWM
  Top 0.254: U5.21 14.8,41.23 14.8,27.13 12.39,24.71 U2.13
MOTOR_STBY  (via drill 0.3)
  Top 0.254: U2.4 11.89,20.53 v11.5,20.14 11.5,19.63 11.89,19.24 U3.14 | U3.4 11.12,15.57 v10.74,15.95 | U5.20 14.29,41.43 14.29,27.25 12.64,25.6 | U2.14 11.89,24.85 12.64,25.6 | 12.64,25.6 v12.13,26.11
  Bottom 0.254: v12.13,26.11 11.5,26.11 10.61,25.22 10.61,24.33 11.5,23.44 v11.5,20.14 11.5,17.6 10.74,16.84 v10.74,15.95
N$2  (via drill 0.35)
  Top 0.254: UFL.3 9.29,56.59 v8.71,56.59 | IR_LED_FL.K 4.63,44.26 v7.82,47.45
  Bottom 0.254: v8.71,56.59 7.84,55.73 7.84,47.47 v7.82,47.45
N$4
  Top 0.254: U6.3 27.95,35.33 R1.2
N$5
  Top 0.254: U5.22 15.68,41.4 C_MCU-C.1
N$7
  Top 0.254: R12.2 1.41,21.73 Q2.2
  Top 1.016: P1.2 2.83,18.16 Q2.2
N$8  (via drill 0.35)
  Top 0.254: R1FL.1 6.05,51.95 v5.99,51.89
  Bottom 0.254: v5.99,51.89 5.99,47.23 IR_LED_FL.A
N$10
  Top 0.254: IR_LED_L.K 14.52,62.66 12.13,60.27 UL.3
N$11  (via drill 0.3)
  Top 0.254: Q2.1 1.66,23.63 R12.1 0.95,23.05 0.45,22.55 0.45,21.16 v0.83,20.78 | POWER.2 22.17,17.97 22.17,16.33 21.66,15.82 19.75,15.82 v19.63,15.7
  Bottom 0.254: v0.83,20.78 0.83,17.6 3.62,14.81 18.74,14.81 v19.63,15.7
N$16
  Top 0.254: R1L.1 18.2,61.57 IR_LED_L.A
N$18  (via drill 0.35)
  Top 0.254: UFR.3 30.12,56.77 31.06,55.83 31.06,53.42 31.06,53.41 31.06,52.53 34.11,49.48 v34.11,46.3
  Bottom 0.254: IR_LED_FR.K 34.37,46.04 v34.11,46.3
N$21
  Top 0.254: P-LED.A 18.75,21.3 19,21.55 R25.1
N$23
  Top 0.254: SPK1.- 22.17,25.43 22.17,26.85 D3.1 23.68,27.65 23.95,27.38 23.95,27.13 24.07,27 UBUZ.3
N$27
  Top 0.254: R26.1 20,68.53 LED1.A
N$28  (via drill 0.35)
  Top 0.254: R1FR.1 32.96,53.66 32.96,51.64 33.95,50.64 v33.95,50.62
  Bottom 0.254: v33.95,50.62 36.89,47.69 IR_LED_FR.A
N$29
  Top 0.254: UR.3 27.12,60.78 25.24,62.66 IR_LED_R.K
N$30
  Top 0.254: R1R.1 20.8,61.57 IR_LED_R.A
N$36
  Top 0.254: LED2.A 34.23,4.89 R27.1
N$41
  Top 0.254: LED3.A 5.28,5.29 R28.1
NRST  (via drill 0.35)
  Top 0.254: K1.5 37.28,15.44 37.28,13.79 34.61,4.01 34.23,3.63 32.81,3.63 RESET.1 RESET.2 | v12.77,51.51 C21.1 13.45,52.1 14.68,50.87 14.94,50.87 15.21,50.87 U5.7 | v12.77,51.51
  Bottom 0.254: v12.77,51.51 12.39,51.13 12.39,49.86 16.2,46.05 16.2,37.1 17.09,36.21 17.09,34.24 17.34,33.98 17.34,33.1 21.28,29.16 23.69,29.16 25.6,31.06 26.48,31.06 27.5,30.05 27.5,21.79 34.49,14.81 35.88,14.81 K1.5
PUSH_IN_1  (via drill 0.3)
  Top 0.254: MODE.1 MODE.2 6.04,3.78 6.04,4.65 4.64,12.52 v4.64,13.54 | v18.23,19 18,19.23 18,23.1 15.71,25.39 15.71,35.15 v16.32,35.76 | v15.44,53.92 15.69,53.67 15.69,52.96 R3.1 16.48,52.17 16.48,51.02 U5.5
  Bottom 0.254: v4.64,13.54 5.51,14.4 19.35,14.4 20.26,15.32 20.26,16.08 18.23,18.11 v18.23,19 | v15.44,53.92 14.25,53.92 11.98,51.65 11.98,49.63 15.79,45.82 15.79,36.93 16.32,36.4 v16.32,35.76
SENSOR_FL  (via drill 0.35)
  Top 0.254: U5.12 14.29,48.26 10.57,48.26 PT_FL.K | R2FL.2 6.29,56.84 v6.29,58.11
  Bottom 0.254: v6.29,58.11 6.29,56.97 6.65,56.62 6.65,44.34 PT_FL.K
SENSOR_FR  (via drill 0.35)
  Top 0.254: U5.10 14.89,49.07 12.54,49.07 11.63,49.99 6.16,49.99 v5.02,51.13 | PT_FR.K 34.87,45.9 34.87,55.7 34.11,56.46 R2FR.2 32.45,57.22 32.45,58.11 v28.39,62.18
  Bottom 0.254: v28.39,62.18 23.06,67.51 13.15,67.51 4.13,58.5 4.13,52.02 v5.02,51.13
SENSOR_L  (via drill 0.35)
  Top 0.254: U5.13 13.66,47.83 10.74,47.83 7.44,44.53 v7.44,43 | v7.05,57.35 7.31,57.1 R2L.2
  Bottom 0.254: PT_L.K 11.14,61.44 v7.05,57.35 7.05,44.65 7.44,44.27 v7.44,43
SENSOR_R  (via drill 0.35)
  Top 0.254: U5.11 14.59,48.67 12.31,48.67 11.5,49.48 5.02,49.48 v4.13,50.37 | v27.63,61.42 28.26,61.42 31.82,57.86 R2R.2
  Bottom 0.254: PT_R.K 27.6,61.44 v27.63,61.42 28.56,61.42 29.15,62.01 29.15,62.56 28.77,62.94 28.2,62.94 23.22,67.92 12.98,67.92 3.73,58.66 3.73,50.77 v4.13,50.37
SPI2_MISO  (via drill 0.3)
  Top 0.254: U4.1 18.34,36.51 v18.61,36.78 | U6.2 24.95,34.68 24.45,35.17 24.45,36.4 22.29,38.56 v22.29,39.32 22.68,39.7 22.68,41.31 21.94,42.04 21.92,42.04 U5.27
  Bottom 0.254: v18.61,36.78 19.75,36.78 20.52,37.54 21.15,37.54 22.29,38.68 v22.29,39.32
SPI2_MOSI  (via drill 0.3)
  Top 0.254: v23.06,36.78 23.06,36 U6.5 | 23.18,41.49 v23.18,38.81 | U4.14 19.05,35.86 19.05,35.49 19.43,35.1 v19.85,35.1 | U5.28 23.18,41.49 | 23.18,41.49
  Bottom 0.254: v23.18,38.81 23.18,36.91 v23.06,36.78 21.38,35.1 v19.85,35.1
SPI2_SCK  (via drill 0.3)
  Top 0.254: U4.13 19.5,37.16 v19.25,37.41 | 21.66,41.6 21.66,39.19 v20.9,38.43 20.9,37.92 22.04,36.78 22.04,35.89 22.6,35.33 U6.6 | U5.26 21.66,41.6 | 21.66,41.6
  Bottom 0.254: v20.9,38.43 20.51,38.43 19.5,37.41 v19.25,37.41
SWCLK  (via drill 0.3, 0.35)
  Top 0.254: U5.37 24.43,47.85 v24.71,47.57 | v24.83,45.29 24.83,44.14 26.99,41.99 v26.99,39.45 | v35.5,22.7 35.14,22.7 33.85,21.41 v32.45,21.41
  Bottom 0.254: v24.71,47.57 25.21,47.07 25.21,45.67 v24.83,45.29 | v26.99,39.45 26.99,38.18 30.04,35.13 30.04,22.68 31.31,21.41 v32.45,21.41 | K1.4 38.3,18.49 38.3,21.79 37.38,22.7 v35.5,22.7
SWDIO  (via drill 0.3, 0.35)
  Top 0.254: U5.34 23.95,44.97 23.95,44.4 26.36,41.99 v26.36,38.56 | v33.47,20.4 35.12,22.05 v36.26,22.05
  Bottom 0.254: v26.36,38.56 26.36,38.18 29.53,35 29.53,22.55 31.18,20.9 31.82,20.9 32.33,20.4 v33.47,20.4 | v36.26,22.05 37.28,22.05 37.79,21.54 37.79,19.25 K1.3
SWO  (via drill 0.3)
  Top 0.254: U5.39 23.63,49.35 24.46,49.35 25.72,48.09 v25.72,47.7 | v25.72,44.4 25.72,44.14 27.63,42.24 v27.63,38.56
  Bottom 0.254: v25.72,47.7 v25.72,44.4 | v27.63,38.56 27.63,38.18 30.55,35.25 30.55,22.94 31.31,22.17 34.36,22.17 K1.10
USART1_RX  (via drill 0.3)
  Top 0.254: U5.31 25.09,41.7 v25.09,39.32
  Bottom 0.254: v25.09,39.32 25.09,38.05 28.52,34.62 28.52,22.17 31.06,19.63 K1.9
USART1_TX  (via drill 0.3)
  Top 0.254: U5.30 24.45,41.63 v24.45,38.68
  Bottom 0.254: v24.45,38.68 24.45,38.05 28.01,34.49 28.01,22.05 31.69,18.36 K1.8
VOL_CHECK
  Top 0.254: R4.1 R5.2 10.74,25.36 10.74,26.24 11.78,27.28 13.05,27.28 13.28,27.51 13.28,41.83 U5.18

## Text on the board
tTest: Nightfall-mini-2e v1.0